# Altium PCB S4V_ToF_Sensor_Module_Board_V1.0_PCB.PcbDoc
Units mm, origin at the board's own origin, x right, y up, seen from the top; angles counter-clockwise.
Board outline 53.11 x 22 mm, 2 copper layers (Top Layer, Bottom Layer); 43 components, 28 nets, 169 pads, 79 vias.
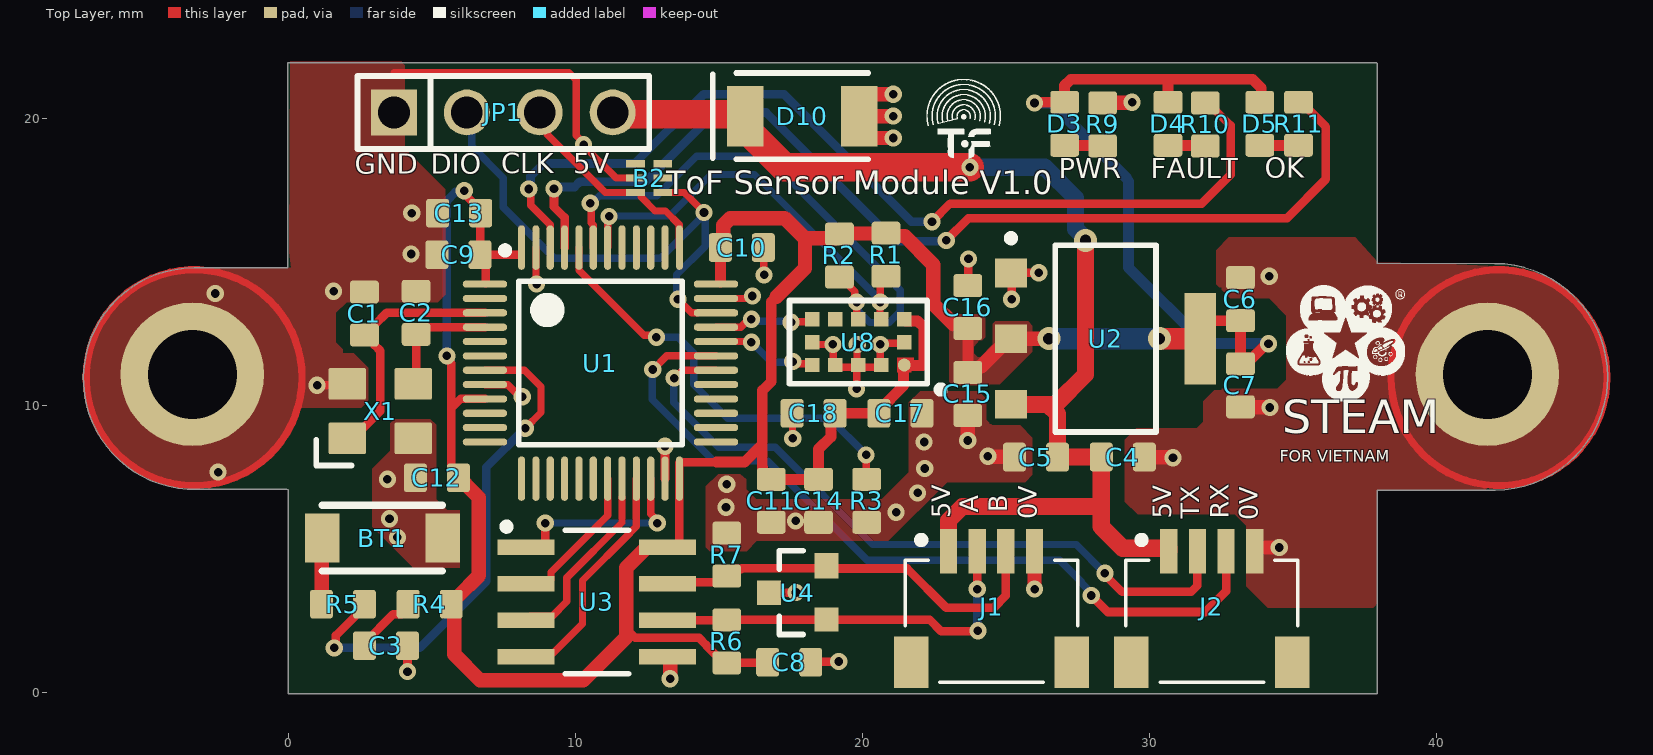
[diagram p0: Top Layer view]
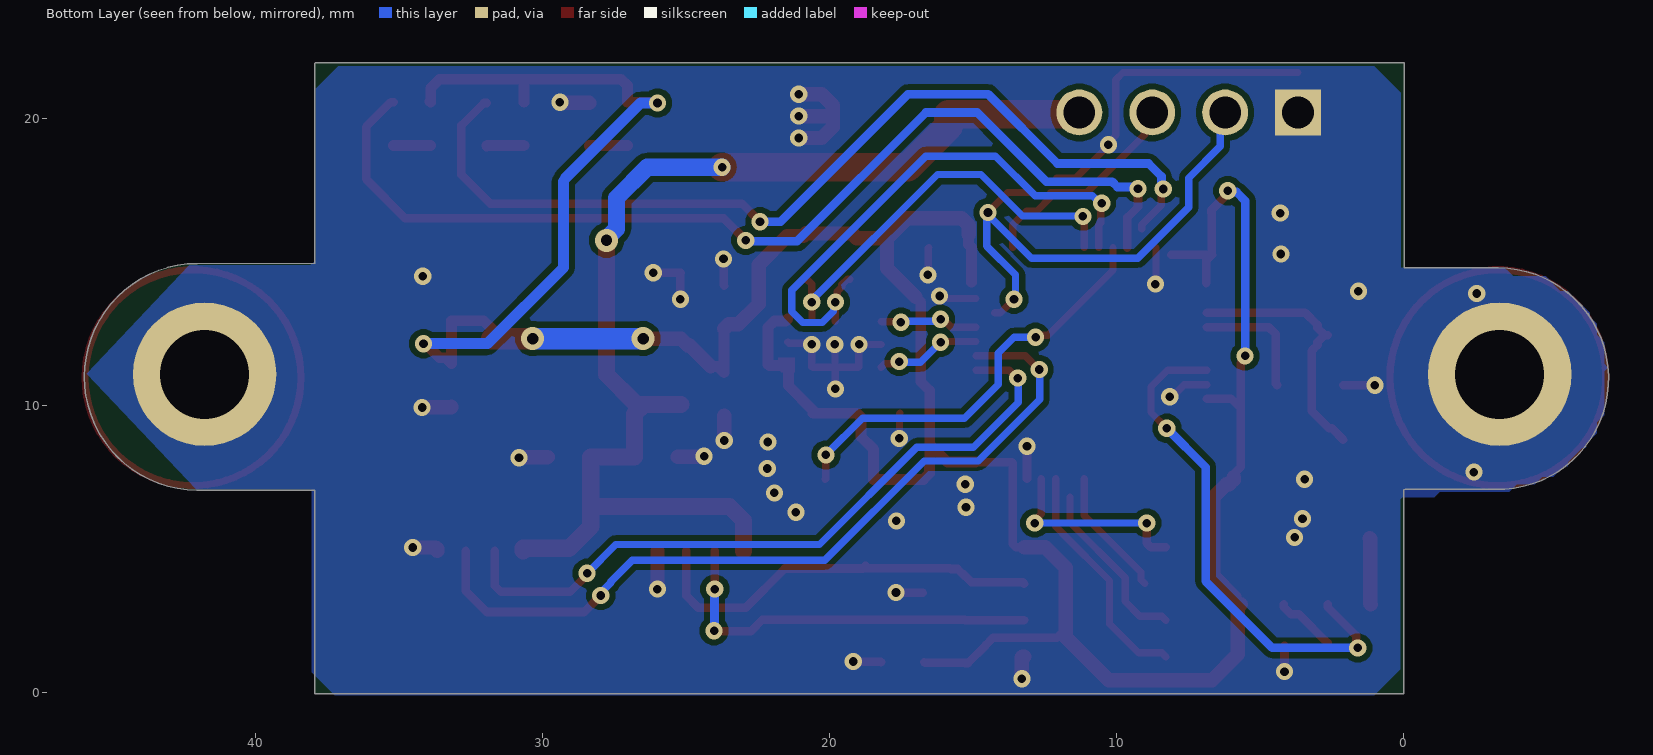
[diagram p1: Bottom Layer view, seen from below]
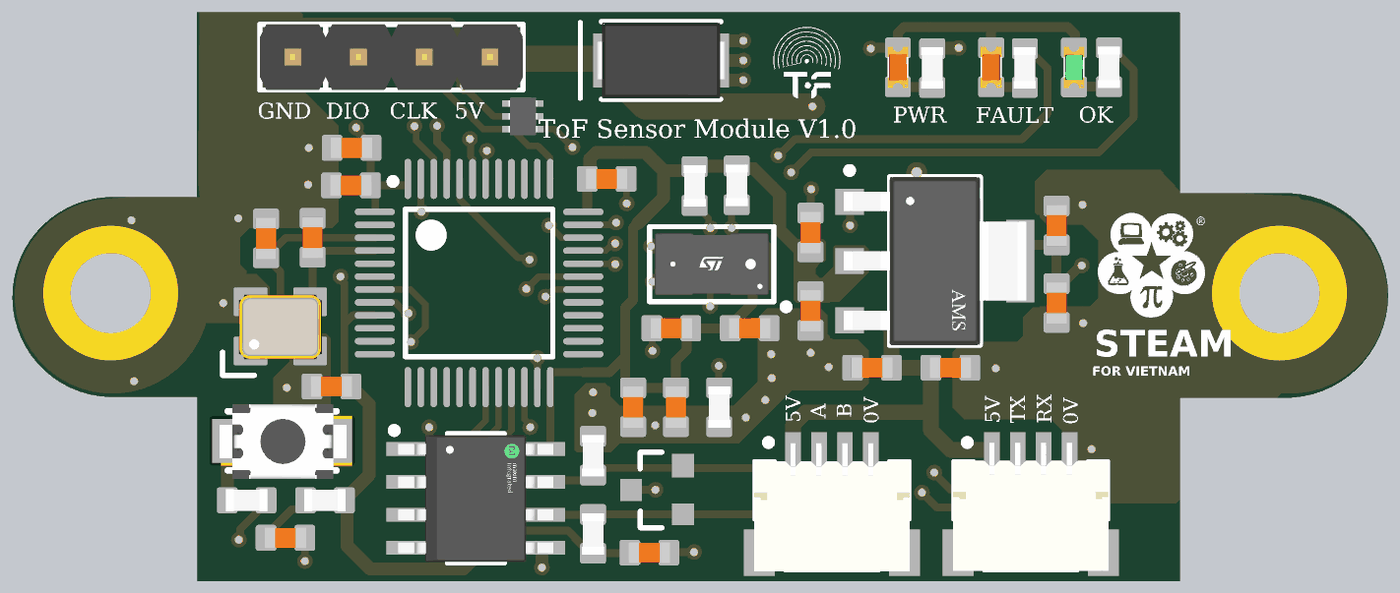
[diagram p2: 3D render of the assembled board from above, using the file's embedded part models]

## Layer stack, top to bottom
Top Solder: solder mask 0.0102, Solder Resist, Dk 3.5
Top Layer: signal copper 0.0356
Dielectric 1: dielectric 0.32, FR-4, Dk 4.8
Bottom Layer: signal copper 0.0356
Bottom Solder: solder mask 0.0102, Solder Resist, Dk 3.5

## Board outline
-3.183,7.06 -0.052,7.06 -0.006,7.046 -0.006,-0.069 37.939,-0.069 37.939,7.028 42.048,7.028 ccw(c42.022,10.979) 42.04,14.93 37.947,14.931 cw(c37.969,14.952) 37.939,14.952 37.939,21.907 37.914,21.931 0.148,21.931 0.148,21.929 -0.026,21.929 -0.026,14.775 -0.05,14.782 -3.301,14.782 ccw(c-3.276,10.92)

## Design rules (kind name [scope] priority, off if disabled: settings)
Clearance [All] p1: gap=0.2 ignorepadtopadclearanceinfootprint=TRUE
HoleSize [All] p1: absolutevalues=TRUE maxlimit=4 minlimit=0.025 maxpercent=80.000 minpercent=20.000
MinimumSolderMaskSliver [All] p1: minsoldermaskwidth=0.2
PolygonConnect [All] p1: connectstyle=Direct reliefconductorwidth=0.254 reliefentries=4 polygonreliefangle="90 Angle" airgapwidth=0.254
RoutingVias [All] p1: holewidth=0.3 width=1.27 viastyle="Through Hole" minholewidth=0.3 minwidth=0.3 maxholewidth=0.6 maxwidth=4
SilkToSolderMaskClearance [IsPad] p1: minsilkscreentomaskgap=0.1 clearancetoexposedcopper=TRUE
SolderMaskExpansion SolderMaskExpansion_VIA [IsVia] p1: expansion=0.102 istentingtop=TRUE
SolderMaskExpansion [All] p2: expansion=0 istentingtop=FALSE
Width [All] p1: maxlimit=1.3 minlimit=0.2 preferedwidth=0.2
27 further rules are at their usual default settings.

## Components (designator, comment, footprint, x,y, rotation, side; value= is the part's Value field where it differs from the comment)
B2 "ESDALC6V1-5M6" ESDALC6V15M6 12.573,17.907 r270 top
BT1 "Button_3x4mm_SMD" Button_3x4mm_SMD 1.178,5.362 r0 top
C1 "20pF" CAP_0603 2.653,13.187 r270 top
C2 "20pF" CAP_0603 4.453,13.212 r270 top
C3 "100nF" CAP_0603 3.403,1.612 r180 top
C4 "10uF" CAP_0603 29.078,8.187 r180 top
C5 "100nF" CAP_0603 26.053,8.187 r0 top
C6 "10uF" CAP_0603 33.178,13.687 r270 top
C7 "100nF" CAP_0603 33.178,10.687 r90 top
C8 "1uF" CAP_0603 17.453,1.037 r180 top
C9 "10uF" CAP_0603 5.928,15.237 r0 top
C10 "100nF" CAP_0603 15.803,15.487 r180 top
C11 "100nF" CAP_0603 16.828,6.662 r90 top
C12 "100nF" CAP_0603 5.178,7.462 r0 top
C13 "100nF" CAP_0603 5.953,16.687 r0 top
C14 "100nF" CAP_0603 18.478,6.662 r90 top
C15 "1uF" CAP_0603 23.678,10.387 r90 top
C16 "100nF" CAP_0603 23.678,13.412 r270 top
C17 "100nF" CAP_0603 21.328,9.712 r180 top
C18 "4.7uF" CAP_0603 18.303,9.712 r0 top
D3 "RED" LED_0603_RED 27.051,19.8 r90 top
D4 "RED" LED_0603_RED 30.651,19.8 r90 top
D5 "GREEN" LED_0603_GREEN 33.85,19.798 r90 top
D10 "SMAJ5.0A" BOUR-SMA-2_V 17.907,20.066 r180 top
J1 "JST_SH1.0" JST_SM04B-SRSS-TB(LF)(SN) 24.503,4.912 r0 top
J2 "JST_SH1.0" JST_SM04B-SRSS-TB(LF)(SN) 32.178,4.912 r0 top
JP1 "JP 1x04" "JP 1x4 DT" 3.683,20.193 r0 top
R1 "3.3k" RES_0603 20.828,15.237 r90 top
R2 "3.3k" RES_0603 19.203,15.212 r90 top
R3 "10k" RES_0603 20.153,6.662 r270 top
R4 "10k" RES_0603 4.928,3.062 r0 top
R5 "330" RES_0603 1.903,3.062 r180 top
R6 "1k" RES_0603 15.278,1.762 r90 top
R7 "1k" RES_0603 15.278,4.787 r270 top
R9 "1k" RES_0603 28.376,19.775 r90 top
R10 "1k" RES_0603 31.951,19.775 r90 top
R11 "1k" RES_0603 35.201,19.8 r90 top
U1 "STM32F103C8T6" STM-LQFP48_L 10.878,11.462 r0 top
U2 "AMS1117-3.3" FP-AMS1117-IPC_C 28.478,12.312 r0 top
U3 "MAX3485ESA+" FP-S8-5-MFG 10.753,3.137 r0 top
U4 "PSM712-LF-T7" PRKT-SOT23-3_V 17.753,3.46 r180 top
U8 "VL53L0CXV0DH/1" FP-LGA-12-MFG 19.863,12.192 r0 top
X1 "8MHz" XTAL_3225 3.203,9.787 r0 top

## Footprints (in the part's own frame and the unit in brackets; to place one, negate y for a bottom-side part, rotate by r counter-clockwise, add the part's x,y. Pads: shape width x height; smd on the part's side, far side on the other; paste and mask are expansions set on the pad)
BOUR-SMA-2_V [mm] "SMA, 2-Leads, Body 4.57x2.92mm"
  rect 1.27x2.1 smd: 1(-1.985,0) 2(1.985,0)
  silkscreen extent -2.3,-1.5 3.12,1.5, body extent -2.5,-1.46 2.5,1.46, height 2.62
Button_3x4mm_SMD [mm]
  rect 1.2x1.7 smd mask+0.102: 1(0,0) 2(4.2,0)
  silkscreen extent 0,-1.14 4.19,1.14, body extent -0.33,-1.48 4.57,1.42, height 2.01
CAP_0603 [mm]
  rrect25% 0.8x1 smd: 1(-0.75,0) 2(0.75,0)
  body extent -0.8,-0.4 0.8,0.4, height 0.51
ESDALC6V15M6 [mm]
  rect 0.25x0.65 smd: 1(-0.5,-0.475) 2(0,-0.475) 3(0.5,-0.475) 4(0.5,0.475) 5(0,0.475) 6(-0.5,0.475)
  body extent -0.72,-0.55 0.72,0.55, height 0.65
FP-AMS1117-IPC_C [mm]
  rect 1.1x1 smd paste+0 mask+0: 1(-3.295,2.29) 2(-3.295,0) 3(-3.295,-2.29)
  rect 1.1x3.182 smd paste+0 mask+0: 4(3.295,0)
  silkscreen extent -3.42,-3.25 1.75,3.62, body extent -3.9,-3.35 3.9,3.35, height 0.25
FP-LGA-12-MFG [mm]
  round 0.45 smd paste+0 mask+0: 1(1.6,-0.8)
  rect 0.5x0.5 smd paste+0 mask+0: 2(0.8,-0.8) 3(0,-0.8) 4(-0.8,-0.8) 5(-1.6,-0.8) 6(-1.6,0) 7(-1.6,0.8) 8(-0.8,0.8) 9(0,0.8) 10(0.8,0.8) 11(1.6,0.8) 12(1.6,0)
  Top Layer region: 1.35,-0.55 1.93,-0.55 1.93,-0.8 1.85,-0.8 1.85,-1.05 1.35,-1.05
  silkscreen extent -2.4,-1.78 3,1.45, body extent -2.73,-1.73 2.73,1.73, height 0.25
FP-S8-5-MFG [mm]
  rect 1.98x0.53 smd paste+0 mask+0: 1(-2.465,1.905) 2(-2.465,0.635) 3(-2.465,-0.635) 4(-2.465,-1.905) 5(2.465,-1.905) 6(2.465,-0.635) 7(2.465,0.635) 8(2.465,1.905)
  silkscreen extent -3.27,-2.5 1.1,2.75, body extent -3.55,-2.75 3.55,2.75, height 0.25
"JP 1x4 DT" [mm] "4 pins, 1 row, straight, gold plating"
  rect 1.6x1.6 hole 1.1: 1(0,0)
  round 1.6 hole 1.1: 2(2.54,0) 3(5.08,0) 4(7.62,0)
  silkscreen extent -1.27,-1.27 8.89,1.27, body extent -1.27,-1.27 8.89,1.27, height 8.54
JST_SM04B-SRSS-TB(LF)(SN) [mm]
  rect 0.6x1.55 smd: 1(-1.5,0) 2(-0.5,0) 3(0.5,0) 4(1.5,0)
  rect 1.2x1.8 smd: S1(-2.8,-3.875) S2(2.8,-3.875)
  silkscreen extent -3,-4.57 3,0.48, body extent -3,-4.6 3,0.35, height 2.91
LED_0603_GREEN [mm]
  rrect25% 0.8x1 smd: A(0.75,0) K(-0.75,0)
  body extent -0.8,-0.4 0.8,0.4, height 0.6
LED_0603_RED [mm]
  rrect25% 0.8x1 smd: A(0.75,0) K(-0.75,0)
  body extent -0.8,-0.4 0.8,0.4, height 0.6
PRKT-SOT23-3_V [mm] "SOT23, 3-Leads, Body 2.92x1.3mm, Pitch 0.94mm"
  rect 0.84x0.84 smd: 1(-1,0.94) 3(1,0)
  rect 0.84x0.9 smd: 2(-1,-0.94)
  silkscreen extent -0.18,-1.46 0.65,1.46, body extent -0.65,-1.46 0.65,1.46, height 1.17
RES_0603 [mm]
  rrect25% 0.8x1 smd: 1(-0.75,0) 2(0.75,0)
  body extent -0.8,-0.43 0.8,0.43, height 0.52
STM-LQFP48_L [mm] "QFP, 48-Leads, Body 7x7mm, Pitch 0.5mm, IPC High Density"
  oval 1.55x0.25 smd: 1(-4.025,2.75) 2(-4.025,2.25) 3(-4.025,1.75) 4(-4.025,1.25) 5(-4.025,0.75) 6(-4.025,0.25) 7(-4.025,-0.25) 8(-4.025,-0.75) 9(-4.025,-1.25) 10(-4.025,-1.75) 11(-4.025,-2.25) 12(-4.025,-2.75) 25(4.025,-2.75) 26(4.025,-2.25) 27(4.025,-1.75) 28(4.025,-1.25) 29(4.025,-0.75) 30(4.025,-0.25) 31(4.025,0.25) 32(4.025,0.75) 33(4.025,1.25) 34(4.025,1.75) 35(4.025,2.25) 36(4.025,2.75)
  oval 0.25x1.55 smd: 13(-2.75,-4.025) 14(-2.25,-4.025) 15(-1.75,-4.025) 16(-1.25,-4.025) 17(-0.75,-4.025) 18(-0.25,-4.025) 19(0.25,-4.025) 20(0.75,-4.025) 21(1.25,-4.025) 22(1.75,-4.025) 23(2.25,-4.025) 24(2.75,-4.025) 37(2.75,4.025) 38(2.25,4.025) 39(1.75,4.025) 40(1.25,4.025) 41(0.75,4.025) 42(0.25,4.025) 43(-0.25,4.025) 44(-0.75,4.025) 45(-1.25,4.025) 46(-1.75,4.025) 47(-2.25,4.025) 48(-2.75,4.025)
  silkscreen extent -3.45,-2.85 2.85,4.05, body extent -3.5,-3.5 3.5,3.5, height 1.6
XTAL_3225 [mm]
  rrect10% 1.3x1.1 smd: 1(-1.15,-0.95) 2(1.15,-0.95) 3(1.15,0.95) 4(-1.15,0.95)
  silkscreen extent -2.23,-1.89 -1,-1, body extent -1.6,-1.28 1.6,1.23, height 0.61

## Part data
B2: "STMicroelectronics ESDALC6V1-5M6 Quint Uni-Directional TVS Diode, 30W peak, 6-Pin uQFN", Manufacturer_Name=STMicroelectronics, Mouser Part Number=511-ESDALC6V1-5M6, Arrow Part Number=ESDALC6V1-5M6, Arrow Price/Stock=https://www.arrow.com/en/products/esdalc6v1-5m6/stmicroelectronics?utm_currency=USD&region=nac, Datasheet Link=https://www.st.com/resource/en/datasheet/esdalc6v1-5m6.pdf, Geometry.Height=0.65mm, Manufacturer_Part_Number=ESDALC6V1-5M6, Mouser Price/Stock=https://www.mouser.co.uk/ProductDetail/STMicroelectronics/ESDALC6V1-5M6?qs=riAxU6JNBCsF7CaldDOuJw%3D%3D
BT1: "Button SMD 3x4mm 2 Pins"
C1 C2 C3 C4 C5 C6 C7 C8 C9 C10 C11 C12 C13 C14 C15 C16 C17 C18: library part CAP_0603, "Capacitor SMD 0603"
D3 D4: library part LED_0603_RED, "LED 0603 RED SMD"
D5: library part LED_0603_GREEN, "LED 0603 GREEN SMD"
D10: library part CMP-2000-07090-1, "SMAJ Transient Voltage Suppressor Diode Series, 3.5 V, -55 to 150 degC, 2-Pin SMA, RoHS, Tape and Reel", Capacitance @ Frequency=-, Current - Peak Pulse (10/1000µs)=43.5A, Manufacturer=Bourns, Operating Temperature=-55°C~150°C(TJ), Package / Case=DO-214AC,SMA, Package Description="2-Pin Surface Mount Device, Body 4.315 x 2.605 mm", Package Reference=SMA-2, Power - Peak Pulse=400W, Power Line Protection=No, Standard Package=1, Supplier Device Package=SMA(DO-214AC), Voltage - Breakdown (Min)=6.4V, Voltage - Clamping (Max) @ Ipp=9.2V, Voltage - Reverse Standoff (Typ)=5V, Applications=GeneralPurpose, Bidirectional Channels=-, Catalog Drawings=SMAJSeriesFootprintSMAJ,SMBJSeries, Category=CircuitProtection, Datasheet URL=https://datasheet.ciiva.com/25624/0900766b8112213b-25624680.pdf, Datasheet Version=08/2012, EDA / CAD Models=DownloadfromAcceleratedDesigns, Family=TVS-Diodes, Featured Product=SMAJ/SMBJ/SMCJ/SMLJDiscreteTVSDiodes, Manufacturer URL=http://www.bourns.com/, Mounting Technology=SurfaceMount, Mounting Type=SurfaceMount, Online Catalog=SMAJSeries, Other Names=SMAJ5.0ABDKR, Packaging=Digi-Reel®, RoHS Information=SMAJSeriesMaterialDeclaration, Series=SMAJ, Type=Zener, Unidirectional Channels=1
J1 J2: library part CMP-002-00071-1, "Connector Header Surface Mount, Right Angle 4 position 0.039 (1.00mm)", Case/Package=None, Check_prices=https://www.snapeda.com/parts/SM04B-SRSS-TB(LF)(SN)/JST/view-part/?ref=eda, Component Type=Standard, Design Item ID=SM04B-SRSS-TB(LF)(SN), MF="JST Sales", MP=SM04B-SRSS-TB(LF)(SN), Pins=6, SnapEDA_Link=https://www.snapeda.com/parts/SM04B-SRSS-TB(LF)(SN)/JST/view-part/?ref=snap, Source=SM04B-SRSS-TB(LF)(SN).SchLib
JP1: library part "JP 1x4 2.54 Duc Thang", "Cắm", Chung_Loai=Cắm, Don_Vi=Con, Ma_Hang=MH000903, Ten_Linh_Kien="Jump Đơn Đực 2.54MM 1x40P Thẳng 11MM"
R1 R2 R3 R4 R5 R6 R7 R9 R10 R11: library part RES_0603, "Resistor SMD 0603"
U1: library part CMP-0237-00215-3, "ARM Cortex-M3 32-bit MCU, 64 KB Flash, 20 KB Internal RAM, 37 I/Os, 48-pin LQFP, -40 to 85 degC, Tray", I/Os (High Current)=37, Operating Frequency(F) (Processor speed) (MHz)=72, Supply Voltage(Vcc) min (V)=2, A/D Converter="2x12-bit (10 Channel)", ComponentLink1Description="Manufacturer URL", ComponentLink1URL=http://www.st.com/web/en/home.html, ComponentLink2Description=Datasheet, ComponentLink2URL=http://www.st.com/st-web-ui/static/active/en/resource/technical/document/datasheet/CD00161566.pdf, ComponentLink3Description="Package Specification", ComponentLink3URL=http://www.st.com/st-web-ui/static/active/en/resource/technical/document/datasheet/DM00058181.pdf, Core="ARM Cortex-M3", DatasheetVersion="Rev. 16", FLASH Size (Prog) (kB)=64, Internal RAM Size (kB)=20, Mounting Technology="Surface Mount", PackageDescription="48-Pin Low Profile Quad Flat Package, 7 x 7 mm Body, 0.5 mm Pitch", PackageReference=LQFP48, PackageVersion="Rev. 6, 06/2013", Packing=Tray, PartNumber=STM32F103C8T6
U2: library part CMP-209535-000001-1, "LDO Voltage Regulators 1A, 3.3V", Dropout Voltage=1.1V, Manufacturer="Advanced Monolithic Systems", Max Junction Temp=+125°C, Max Power Dissipation=1.2W, Max Supply Voltage=15V, Nominal Supply Current=5mA, Output Current=1A, Output Voltage=3.3V, Package=AMS1117, Temperature="-40°C to +125°C", Temperature Range Low=-40°C, Automotive=No, Category=IC, ComponentLink2Description=Datasheet, ComponentLink2URL=http://www.advanced-monolithic.com/pdf/ds1117.pdf, Device Class L1="Integrated Circuits (ICs)", Device Class L2="Power Management ICs", Device Class L3="Voltage Regulators - Linear", Height=1.8mm, Ipc Land Pattern Name=SOT229P700X180-4, Lead Free=Yes, Manufacturer Part Number=AMS1117-3.3, Number Of Outputs=1, Octopart=https://octopart.com/ams1117-3.3-advanced+monolithic+systems-25899300, Output Type=Fixed, RoHS=TRUE, Standoff Height=0.64mm, Temperature Range High=+125°C
U3: library part CMP-05679-000038-1, "IC TXRX RS485/422 10MBPS 8SOIC", Manufacturer="Maxim Integrated", Manufacturer Part Number=MAX3485EESA+, Max Supply Voltage=3.6V, Min Supply Voltage=3V, Nominal Supply Current=0.95-1.1mA, Package=S8-5, Temperature="-40°C to +85°C", Temperature Range High=+85°C, Temperature Range Low=-40°C, Automotive=No, Category=IC, ComponentLink2Description=Datasheet, ComponentLink2URL=https://datasheets.maximintegrated.com/en/ds/MAX3483E-MAX3491E.pdf, Data Rate=15Mbits/s, Device Class L1="Integrated Circuits (ICs)", Device Class L2="Interface ICs", Device Class L3="RS-232 / RS-422 / RS-485 Interface ICs", Digikey Description="IC TXRX RS485/422 10MBPS 8SOIC", Footprint Url=https://pdfserv.maximintegrated.com/land_patterns/90-0096.PDF, Height=1.75mm, Interface=RS-485,RS-422, Lead Free=Yes, Mouser Description="RS-422/RS-485 Interface IC 3.3V 12Mbps Transceiver", Number Of Receivers=1, Number Of Transmitters=1, Octopart=https://octopart.com/max3485eesa%2B-maxim+integrated-39731903, RoHS=TRUE, Simplex Duplex="Half Duplex", Standoff Height=0.1mm
U4: library part CMP-2000-07553-1, "TVS Array - Asymmetrical Data Line Protector, 600 W, 7.5 V, -55 to 150 degC, 3-Pin SOT23, RoHS, Tape and Reel", Capacitance=75pF, Case\/Package=SOT-23, Clamping Voltage=17V, Current=20uA, Manufacturer="Protek Devices", Max Operating Temperature=150degC, Min Breakdown Voltage=7.5V, Min Operating Temperature=-55degC, Package Description="3-Pin Small Outline Transistor, Body 2.92 x 1.3 mm, Pitch 0.94 mm", Package Reference=SOT23-3, Power Dissipation=600W, Voltage=12V, Working Voltage=7V, Datasheet URL=www.protekdevices.com/xyz/documents/datasheets/psm712.pdf, Datasheet Version=10/2013, Depth=1.4mm, Direction=Bidirectional, Element Configuration=Dual, Lead Free=LeadFree, Leakage Current=20uA, Length=3.04mm, Manufacturer URL=http://www.protekdevices.com/, Mounting Technology=SurfaceMount, Number of Pins=3, Packaging=TapeandReel, Radiation Hardening=No, RoHSCompliant=True
U8: library part CMP-2000-07484-2, "SENSOR OPTICAL 200CM I2C", Manufacturer=STMicroelectronics, Max Supply Voltage=3.5V, Min Supply Voltage=1.6V, Operating Supply Current=0.016-19mA, Package=LGA-12, Temperature="-20°C to +70°C", Temperature Range High=+70°C, Temperature Range Low=-20°C, Automotive=No, Category=IC, ComponentLink2Description=Datasheet, ComponentLink2URL=https://www.st.com/resource/en/datasheet/vl53l0x.pdf, Device Class L1=Sensors, Device Class L2="Optical Sensors", Device Class L3=unset, Digikey Description="SENSOR OPTICAL 200CM I2C", Height=1.05mm, Lead Free=Yes, Manufacturer Part Number=VL53L0CXV0DH/1, Octopart=https://octopart.com/vl53l0cxv0dh%2F1-stmicroelectronics-71168165, RoHS=TRUE, Sensor Output=I2C
X1: library part TSX-3225_24.0000MF15X-AC, "Crystal SMD 24MHz 10PPM 7pF 3225", Manufacturer=Epson, Manufacturer Part Number="TSX-3225 24.0000MF15X-AC"

## Free pads (board coordinates)
  round 5 hole 3.1 mask+0.102: 3(-3.345,11.071) 3(41.783,11.071)

## Via types
v1: diameter 0.6, hole 0.3, Top Layer to Bottom Layer, tented both sides, 76 vias
v2: diameter 0.8, hole 0.4, Top Layer to Bottom Layer, tented both sides, 3 vias

## Nets (pads, with @x,y where several pads share a name; then routed paths per layer and width w, separated by ;. In a path a pad name is that pad's centre, name@x,y a point inside that pad or via, vN(x,y) a via of type N, cw(c..) or ccw(c..) an arc to the next point about the centre after c; other vN are vias at no path point)
+3.3V: C6.2 C7.2 C8.2 C9.2 C10.2 C11.2 C12.2 C13.2 C14.2 C15.2 C16.2 C17.2 C18.2 D3.A D4.A D5.A R1.2 R2.2 R4.2 R6.1 U1.1 U1.9 U1.24 U1.36 U1.48 U2.2 U2.4 U3.8 U8.1 U8.11 | length 117.4
  Top Layer w0.3: v1(5.528,11.712) 5.528,11.631 5.635,11.523 5.635,11.492 5.674,11.454 5.674,9.882 ; C12.2@5.928,7.487 5.928,7.587 5.678,7.837 5.678,8.009 5.674,8.013 5.674,9.882 ; v1(6.131,17.469) 6.188,17.411 6.188,17.302 6.703,16.787 C13.2 6.69,16.675 6.69,15.249 C9.2 ; U1.9 6.004,10.212 5.674,9.882 ; U1.1@6.874,14.237 6.874,15.041 C9.2 ; U1.48@8.103,15.237 C9.2 ; 11.781,2.19 12.083,1.887 14.313,1.887 14.558,1.642 14.558,1.632 15.178,1.012 R6.1 15.29,1.025 16.691,1.025 C8.2 ; U3.8 13.513,5.042 13.628,5.157 U1.24 13.628,7.987 13.653,8.012 14.928,8.012
  Top Layer w0.381: 14.928,8.012 15.903,8.012 16.514,8.623 ; U1.36@15.053,14.277 C10.2 15.159,15.593 C10.2@15.159,15.931 ; 17.012,13.771 16.828,13.587 16.828,10.812 16.514,10.498 16.514,8.623 ; U8.1@21.439,11.312 21.439,10.673 20.578,9.812 C17.2 C18.2 18.903,9.562 18.903,8.887 18.478,8.462 C14.2 C11.2 16.728,7.412 16.518,7.622 16.518,7.84 16.514,7.845 16.514,8.623 ; U8.1@21.443,11.312 21.502,11.371 22.103,11.371 22.149,11.417 22.149,12.709 21.926,12.933 21.522,12.933 U8.11 ; C16.2 C15.2 23.888,11.347 C15.2@24.151,11.347 ; v1@25.976,20.5 v1(26.001,20.525) 26.026,20.55 D3.A 27.051,21.127 27.274,21.35 30.651,21.35 33.603,21.35 33.901,21.052 33.901,20.6 33.926,20.575 D5.A@33.901,20.55 ; D4.A 30.651,21.325 30.676,21.35 ; U2.4 31.773,12.644 32.066,12.937 C6.2 C7.2 33.387,11.647 33.603,11.647 34.094,12.137 v1(34.153,12.137)
  Top Layer w0.5: R4.2 5.778,2.962 5.778,1.312 6.678,0.412 10.278,0.412 11.778,1.912 11.778,4.327 12.493,5.042 U3.8 ; R4.2@5.895,3.312 6.637,4.054 6.637,6.778 6.178,7.237 6.078,7.237 5.928,7.387 C12.2 C12.2@5.928,7.487 ; C10.2@15.159,15.931 15.159,16.268 15.401,16.51 17.297,16.51 17.999,15.808 ; 17.012,13.771 18.004,14.763 18.004,15.808 ; 18.004,15.813 19.054,15.813 R2.2 19.215,15.975 20.816,15.975 R1.2 20.928,15.887 21.478,15.887 22.478,14.887 22.478,13.52 23.186,12.812 23.528,12.812 C16.2 ; C15.2@24.151,11.347 24.867,12.062 24.933,12.062 U2.2 v2(26.503,12.312)
  Top Layer w0.75: v2(30.353,12.312) U2.4
  Bottom Layer w0.3: v1@5.518,11.722 5.518,17.113 5.828,17.423 6.085,17.423 v1(6.131,17.469)
  Bottom Layer w0.381: v1(26.001,20.525) 26.592,20.525 29.21,17.907 ; 29.28,17.781 29.28,14.785 31.928,12.137 v1(34.153,12.137)
  Bottom Layer w0.75: v2(26.503,12.312) v2(30.353,12.312)
+5V: C4.2 C5.2 D10.2 J1.1 J2.1 JP1.4 U2.3 | length 42.2
  Top Layer w0.6: J1.1 23.003,5.974 23.491,6.462 28.325,6.462 ; U2.3 26.468,10.022 ; v2(27.778,15.737) 27.778,11.062 26.738,10.022 26.468,10.022 ; J2.1 30.678,5.012 29.076,5.012 28.325,5.763 28.325,6.462 ; 26.468,10.022 26.803,9.687 C5.2 C4.2 28.325,8.184 28.325,6.462
  Top Layer w1: JP1.4 11.367,20.13 15.859,20.13 15.859,19.714 17.285,18.288 v1(23.749,18.288)
  Bottom Layer w0.6: v1(23.749,18.288) 26.36,18.288 27.432,17.216 27.432,16.137 27.778,15.791 v2(27.778,15.737)
A: J1.2 R6.2 U3.6 U4.1 | length 13.8
  Top Layer w0.3: U3.6 13.223,2.507 15.273,2.507 R6.2 ; R6.2@15.283,2.517 17.07,2.517 17.075,2.522 22.343,2.522 22.753,2.112 24.003,2.112 v1(24.028,2.137) ; v1(24.003,3.587) J1.2
  Bottom Layer w0.3: v1(24.003,3.587) 24.015,3.575 24.015,2.15 v1(24.028,2.137)
B: J1.3 R7.2 U3.7 U4.2 | length 14.5
  Top Layer w0.3: U3.7 13.277,3.831 15.072,3.831 R7.2@15.378,4.137 ; R7.2@15.286,4.029 15.544,4.287 15.776,4.287 15.804,4.315 U4.2@18.753,4.315 ; U4.2 18.85,4.304 21.562,4.304 22.928,2.937 24.578,2.937 25.003,3.362 J1.3
DE: U1.20 U3.3 | length 6.1
  Top Layer w0.254: U3.3 8.426,2.64 9.192,2.64 9.703,3.151 9.703,3.984 11.628,5.909 U1.20@11.628,6.787
FAULT: R10.2 U1.46 | length 33.2
  Top Layer w0.254: v1(8.382,17.526) 8.448,17.46 8.448,16.956 9.126,16.278 U1.46@9.126,16.135
  Top Layer w0.3: v1(22.428,16.387) 23.059,17.018 31.832,17.018 32.834,18.02 32.834,19.742 32.051,20.525 R10.2
  Bottom Layer w0.3: v1(8.382,17.526) 8.439,17.583 8.439,17.962 8.893,18.415 12.065,18.415 14.478,20.828 17.272,20.828 21.713,16.387 v1(22.428,16.387)
GND: B2.2 BT1.2 C1.1 C2.1 C3.1 C4.1 C5.1 C6.1 C7.1 C8.1 C9.1 C10.1 C11.1 C12.1 C13.1 C14.1 C15.1 C16.1 C17.1 C18.1 D10.1 J1.4 J2.4 JP1.1 pad.3 R3.2 R7.1 R9.2 U1.8 U1.23 U1.35 U1.47 U2.1 U3.5 U4.3 U8.2 U8.3 U8.4 U8.6 U8.12 X1.2 X1.4 | length 91.4
  Top Layer w0.25: 3.683,21.59 9.779,21.59 10.033,21.336 10.033,19.39 10.291,19.132 v1(10.291,19.069) 10.291,19.046 11.43,17.907 B2.2 ; v1(20.628,12.112) 20.668,12.152 20.762,12.152 21.423,12.152 U8.12
  Top Layer w0.254: U1.8 6.855,10.71 7.644,10.71 8.067,10.287 v1(8.153,10.287) ; U1.47 8.63,15.485 8.63,14.235 v1(8.653,14.212) ; U1.35 14.905,13.714 15.993,13.714 16.077,13.797 v1(16.17,13.797) ; C10.1 16.566,15.474 16.566,14.548 v1(16.58,14.535) ; C18.1 17.565,9.699 17.565,8.849 v1(17.578,8.837) ; U8.6@18.203,12.112 v1(18.978,12.112) 18.99,12.1 18.99,11.324 19.003,11.312 U8.3@19.803,11.312 ; v1(19.803,10.562) U8.3@19.803,11.312 ; v1(19.828,12.112) 19.815,12.099 19.815,11.324 U8.3@19.803,11.312 ; v1(20.628,12.112) 20.628,11.337 20.603,11.312 U8.3@19.803,11.312 ; v1@20.726,12.05 20.726,12.116 v1@20.762,12.152 ; 0.48,10.954 ccw(c-3.281,10.954) 0.48,10.954 ; 45.946,10.954 ccw(c42.185,10.954) 45.946,10.954
  Top Layer w0.3: v1(1.003,10.687) X1.4@2.103,10.687 ; v1(4.153,0.712) C3.1 ; U1.23 v1(13.128,8.562) ; U4.3 16.757,3.464 17.688,3.464 v1(17.691,3.467) ; C8.1 18.216,1.05 19.165,1.05 v1(19.178,1.062) ; C16.1 23.69,14.174 23.69,15.079 v1(23.702,15.091) ; v1(25.203,13.687) 25.203,14.589 25.187,14.606 v1(26.149,14.606)
  Top Layer w0.5: U3.5 13.288,1.232 13.303,1.217 v1(13.303,0.462) ; v1(21.082,19.304) 20.277,19.304 19.892,19.689 D10.1 ; v1(21.082,20.066) D10.1 ; v1(21.082,20.828) 20.277,20.828 19.892,20.443 D10.1 ; v1(23.678,8.762) C15.1 ; v1(24.378,8.212) 24.39,8.2 25.291,8.2 C5.1 ; v1(26.003,3.587) J1.4 ; R9.2 28.389,20.537 29.388,20.537 v1(29.401,20.55) ; C4.1 29.841,8.174 30.815,8.174 v1(30.828,8.162) ; C7.1 33.19,9.925 34.191,9.925 v1(34.203,9.912) ; J2.4 33.678,4.987 33.728,5.037 v1(34.528,5.037)
  other v1: 3.803,5.387 17.678,5.962 3.528,6.037 21.178,6.262 15.253,6.437 21.928,6.937 15.278,7.237 3.453,7.412 -2.447,7.662 22.178,7.787 22.153,8.712 -2.547,13.887 1.578,13.962 34.178,14.487 4.278,15.262 4.303,16.687
MCU_BOOT0: R3.1 U1.44 | length 15
  Top Layer w0.254: U1.44 10.13,15.485 10.13,14.696 12.398,12.428 12.762,12.428 v1(12.828,12.362) ; v1(20.134,8.262) 20.134,7.431 R3.1
  Bottom Layer w0.254: v1(12.828,12.362) 13.578,12.362 14.128,11.812 14.128,10.712 15.303,9.537 18.859,9.537 v1(20.134,8.262)
MCU_OSCIN: C1.2 U1.3 X1.1 | length 8.9
  Top Layer w0.3: X1.1@2.103,8.787 2.503,9.187 2.603,9.187 3.203,9.787 3.203,11.887 3.003,12.087 3.003,12.187 C1.2@2.753,12.437 ; C1.2 C1.2@2.753,12.437 ; U1.3 3.428,13.212 3.003,12.787 3.003,12.687 C1.2@2.753,12.437
MCU_OSCOUT: C2.2 U1.4 X1.3 | length 4.3
  Top Layer w0.3: X1.3@4.403,10.687 4.453,10.737 C2.2 4.703,12.712 U1.4
NetBT1_1: BT1.1 R5.2 | length 2.3
  Top Layer w0.5: R5.2 1.165,3.075 1.165,5.35 BT1.1
NetC3_2: C3.2 R4.1 | length 2.2
  Top Layer w0.3: C3.2 2.653,1.712 3.653,2.712 3.928,2.712 4.178,2.962 R4.1
NetD3_K: D3.K R9.1 | length 1.3
  Top Layer w0.381: D3.K 27.063,19.038 28.364,19.038 R9.1
NetD4_K: D4.K R10.1 | length 1.3
  Top Layer w0.381: D4.K 30.664,19.037 31.939,19.037 R10.1
NetD5_K: D5.K R11.1 | length 1.3
  Top Layer w0.381: D5.K@33.901,19.05 R11.1
NetR5_1: R5.1 U1.7 | length 18
  Top Layer w0.254: U1.7 8.228,11.212 8.803,10.637 8.803,9.737 v1(8.253,9.187)
  Top Layer w0.3: v1(1.603,1.537) 1.66,1.594 1.66,1.969 2.653,2.962 R5.1
  Bottom Layer w0.3: v1(1.603,1.537) 4.578,1.537 6.903,3.862 6.903,7.837 v1(8.253,9.187)
OK: R11.2 U1.45 | length 36.1
  Top Layer w0.3: v1(9.259,17.539) 9.259,16.903 9.628,16.534 U1.45 ; v1(22.928,15.737) 23.701,16.51 34.798,16.51 36.151,17.863 36.151,19.7 35.301,20.55 R11.2
  Bottom Layer w0.3: v1(9.259,17.539) 9.317,17.596 9.976,17.596 10.159,17.78 12.446,17.78 14.859,20.193 16.647,20.193 21.128,15.712 22.903,15.712 v1(22.928,15.737)
RE: U1.19 U3.2 | length 4.5
  Top Layer w0.254: U3.2@9.019,3.778 9.151,3.91 9.151,4.172 11.128,6.149 U1.19
SWCLK: B2.3 JP1.3 U1.37 | length 7.7
  Top Layer w0.254: JP1.3 9.021,19.935 9.021,19.427 11.041,17.407 B2.3 12.294,17.407 12.296,17.405 12.296,17.247 12.78,16.762 13.142,16.762 13.626,16.278 13.626,15.489 U1.37
SWDIO: B2.4 JP1.2 U1.34 | length 18.3
  Top Layer w0.254: B2.4 13.795,17.407 14.484,16.717 v1(14.484,16.709) ; v1(13.578,13.687) 14.051,13.214 U1.34@14.255,13.214
  Bottom Layer w0.254: JP1.2 6.388,20.028 6.388,19.012 7.493,17.907 7.493,16.891 9.271,15.113 12.968,15.113 14.484,16.63 v1(14.484,16.709) 14.528,16.665 14.528,15.537 13.528,14.537 13.528,13.737 v1(13.578,13.687)
USART1_RX: J2.3 U1.31 | length 28.2
  Top Layer w0.254: v1(12.703,11.237) 12.716,11.237 13.191,11.712 U1.31
  Top Layer w0.3: v1@28.028,3.312 28.553,2.787 31.953,2.787 32.678,3.512 J2.3
  Bottom Layer w0.254: v1(12.703,11.237) 12.678,11.212 12.678,10.195 14.822,8.051 16.711,8.051 20.176,4.586 26.879,4.586 27.628,3.837 27.628,3.806 27.978,3.456 v1(27.978,3.362)
USART1_TX: J2.2 U1.30 | length 24.8
  Top Layer w0.254: v1(13.445,10.937) 13.472,10.937 13.747,11.212 U1.30
  Top Layer w0.3: v1@28.478,4.212 28.478,4.062 29.053,3.487 31.453,3.487 31.678,3.712 J2.2
  Bottom Layer w0.254: v1(13.445,10.937) 13.428,10.92 13.428,10.087 14.99,8.525 16.965,8.525 20.353,5.137 27.453,5.137 v1(28.453,4.137)
USART3_RX: U1.22 U3.1 | length 7.1
  Top Layer w0.254: U1.22 12.628,6.206 12.853,5.981 v1(12.853,5.887)
  Top Layer w0.3: U3.1 8.815,5.042 8.953,5.18 8.953,5.812 8.878,5.887 v1(8.953,5.887)
  Bottom Layer w0.254: v1(8.953,5.887) v1(12.853,5.887)
USART3_TX: U1.21 U3.4 | length 8.3
  Top Layer w0.254: U3.4 8.426,1.37 9.239,1.37 10.25,2.381 10.25,3.883 11.901,5.534 11.901,5.54 12.128,5.767 U1.21@12.128,6.789 ; U1.21@12.128,6.789 U1.21
VL53_INT: U1.33 U8.7 | length 3.5
  Top Layer w0.254: U1.33 14.905,12.714 15.769,12.714 16.042,12.987 v1(16.136,12.987) ; v1(17.518,12.887) 17.531,12.899 18.19,12.899 U8.7@18.203,12.912
  Bottom Layer w0.254: v1(16.136,12.987) 16.202,12.921 16.447,12.921 16.449,12.919 17.483,12.919 v1@17.517,12.885
VL53_SCL: R1.1 U1.42 U8.10 | length 14.6
  Top Layer w0.254: U1.42 11.13,15.489 11.13,16.523 v1(11.18,16.572) ; U8.10@20.603,12.912 20.615,12.925 20.615,13.575 v1(20.628,13.587) 20.628,14.214 20.801,14.387 R1.1@20.853,14.387
  Bottom Layer w0.254: v1(11.18,16.572) 11.194,16.586 13.284,16.586 14.732,18.034 16.243,18.034 20.628,13.649 v1(20.628,13.587)
VL53_SDA: R2.1 U1.43 U8.9 | length 19.6
  Top Layer w0.254: v1(10.521,17.033) 10.553,17.001 10.553,16.352 10.58,16.324 10.58,16.313 10.626,16.267 10.626,15.489 U1.43 ; R2.1@19.303,14.387 19.378,14.387 19.576,14.189 19.576,14.114 19.737,13.953 19.737,13.653 v1(19.803,13.587) U8.9@19.803,12.912
  Bottom Layer w0.254: v1(10.521,17.033) 10.586,17.033 10.842,17.289 12.844,17.289 14.224,18.669 16.65,18.669 21.324,13.995 21.324,13.258 20.944,12.878 20.26,12.878 19.869,13.269 19.869,13.521 v1(19.803,13.587)
XSHUT: U1.32 U8.5 | length 3.7
  Top Layer w0.254: U1.32 14.905,12.21 16.114,12.21 v1(16.137,12.187) ; v1(17.578,11.512) 17.672,11.512 17.749,11.435 18.08,11.435 U8.5@18.203,11.312
  Bottom Layer w0.254: v1(16.137,12.187) 16.837,11.487 17.553,11.487 v1(17.578,11.512)
pads on no net: B2.1 B2.5 B2.6 J1.S1 J1.S2 J2.S1 J2.S2 U1.2 U1.5 U1.6 U1.10 U1.11 U1.12 U1.13 U1.14 U1.15 U1.16 U1.17 U1.18 U1.25 U1.26 U1.27 U1.28 U1.29 U1.38 U1.39 U1.40 U1.41 U8.8

## Polygon pours and split planes (outlines as drawn)
GND on Top Layer "Top Layer-GND" (solid, pour order 5): 29.153,6.637 29.603,6.187 32.978,6.187 33.378,5.787 33.378,3.687 34.128,2.937 37.803,2.937 37.953,3.087 37.953,7.028 41.699,7.028 46.003,11.332 42.523,14.812 40.329,14.93 37.969,14.982 37.178,15.837 32.778,15.837 32.328,15.387 32.328,14.212 32.828,13.712 34.178,13.712 34.778,13.112 34.778,10.887 34.453,10.562 32.303,10.562 31.878,10.137 31.878,9.412 31.653,9.187 29.553,9.187 29.153,8.787
GND on Top Layer "GND_L01_P013" (solid, pour order 13): 42.185,7.193 cw(c42.185,10.954) 38.423,10.954 cw(c42.185,10.954) 42.185,14.715 cw(c42.185,10.954) 45.946,10.954 cw(c42.185,10.954)
GND on Top Layer "GND_L01_P012" (solid, pour order 12): -0.254,9.906 2.54,9.906 2.794,10.16 2.794,11.303 2.286,11.811 1.905,11.811 1.905,11.938 1.651,12.192 1.651,13.208 2.032,13.589 5.207,13.589 5.461,13.843 5.461,17.526 4.064,18.923 4.064,21.844 3.937,21.971 0.076,21.971 0.037,15.318 0.095,14.782 -1.707,14.775 -2.617,14.782 -3.528,14.715
GND on Top Layer "GND_L01_P010" (solid, pour order 10): -3.281,7.193 cw(c-3.281,10.954) -7.043,10.954 cw(c-3.281,10.954) -3.281,14.715 cw(c-3.281,10.954) 0.48,10.954 cw(c-3.281,10.954)
+3.3V on Top Layer "+3.3V_L01_P003" (solid, pour order 3): 25.778,12.912 24.628,12.912 24.553,12.837 24.553,12.112 24.103,11.662 24.028,11.662 23.878,11.812 23.878,12.037 24.078,12.262 24.178,12.262 24.278,12.362 24.278,13.037 24.153,13.162 23.178,13.162 23.028,13.012 23.028,10.812 23.153,10.687 24.753,10.687 25.728,11.662 25.928,11.862 25.928,12.762
GND on Top Layer "GND_L01_P001" (solid, pour order 1): 5.978,4.337 4.353,4.337 2.928,5.762 2.928,7.787 3.553,8.412 3.553,9.362 3.703,9.512 4.953,9.512 5.153,9.312 5.153,6.721 5.537,6.337 5.978,6.337
GND on Top Layer "GND_L01_P000" (solid, pour order 0): 14.978,7.587 14.553,7.162 14.553,5.037 14.678,4.912 15.978,4.912 16.328,5.262 20.903,5.262 22.953,7.312 25.678,7.312 25.928,7.562 25.928,8.862 25.503,9.287 24.528,9.287 24.328,9.487 24.328,10.212 24.053,10.487 22.012,10.487 21.628,10.103 21.628,7.662 20.678,6.712 16.303,6.712 15.953,7.062 15.953,7.412 15.753,7.587 15.728,7.587
GND on Bottom Layer "GND_L02_P007" (solid, pour order 7): -3.501,14.787 -3.81,14.478 -4.953,14.478 -5.461,13.97 -5.715,13.97 -6.477,13.208 -6.477,13.081 -6.731,12.827 -6.731,12.446 -6.985,12.192 -6.985,11.43 -7.112,11.303 -6.985,11.176 -6.985,9.652 -6.731,9.398 -6.731,9.017 -6.35,8.636 -6.35,8.509 -6.223,8.509 -5.715,8.001 -5.715,7.874 -5.588,7.874 -5.207,7.493 -4.826,7.493 -4.572,7.239 -3.937,7.239 -3.683,6.985 -0.635,6.985 -0.381,7.239
GND on Bottom Layer "GND_L02_P006" (solid, pour order 6): -3.501,14.787 -6.287,12.001 -1.072,6.787 0.053,6.787 0.128,6.712 0.128,0.787 1.028,-0.113 37.253,-0.113 38.053,0.687 38.053,7.06 42.08,7.06 45.884,11.086 42.324,14.862 38.103,14.862 37.914,15.051 37.914,21.026 37.128,21.812 1.028,21.812 0.103,20.887 0.103,14.812 0.078,14.787

## Silkscreen, mask and mechanical layers (free items; w line width, h text height)
Top Overlay:
  drawing of 40 lines, arcs and shapes, not listed
  text "CLK" at 7.421,17.826 h1.2
  text "5V" at 9.924,17.828 h1.2
  text "GND" at 2.323,17.817 h1.2
  text "DIO" at 4.964,17.817 h1.2
  text "OK" at 34.028,17.668 h1.2
  text "PWR" at 26.853,17.663 h1.2
  text "FAULT" at 30.053,17.654 h1.2
  text "ToF Sensor Module V1.0" at 13.167,17.071 h1.4
  text "STEAM" at 34.628,8.625 h2
  text "FOR VIETNAM" at 34.544,7.884 h0.7
  text "B" at 25.253,6.262 h1.1 r90
  text "A" at 24.253,6.238 h1.1 r90
  text "5V" at 23.278,6.062 h1.1 r90
  text "5V" at 30.978,6.037 h1.1 r90
  text "TX" at 31.953,6.038 h1.1 r90
  text "RX" at 32.978,6.037 h1.1 r90
  text "0V" at 26.295,6.013 h1.1 r90
  text "0V" at 33.995,5.988 h1.1 r90
Mechanical 13:
  lines w0.254: -0.052,7.06 -3.183,7.06 cw(c-3.276,10.92) -3.301,14.782 -0.05,14.782 ; -0.026,14.775 -0.026,21.929 0.148,21.929 0.148,21.931 37.914,21.931 37.939,21.907 37.939,14.952 ccw(c37.969,14.952) 37.947,14.931 42.04,14.93 cw(c42.022,10.979) 42.048,7.028 37.939,7.028 37.939,-0.069 -0.006,-0.069 -0.006,7.046

## Text inside footprints (layer, text, board x,y; h text height)
D5: Mechanical 13 "+" at 12.668,-4.793 h0.5 r90